# EAGLE board 1 (EAGLE 9.3.2)
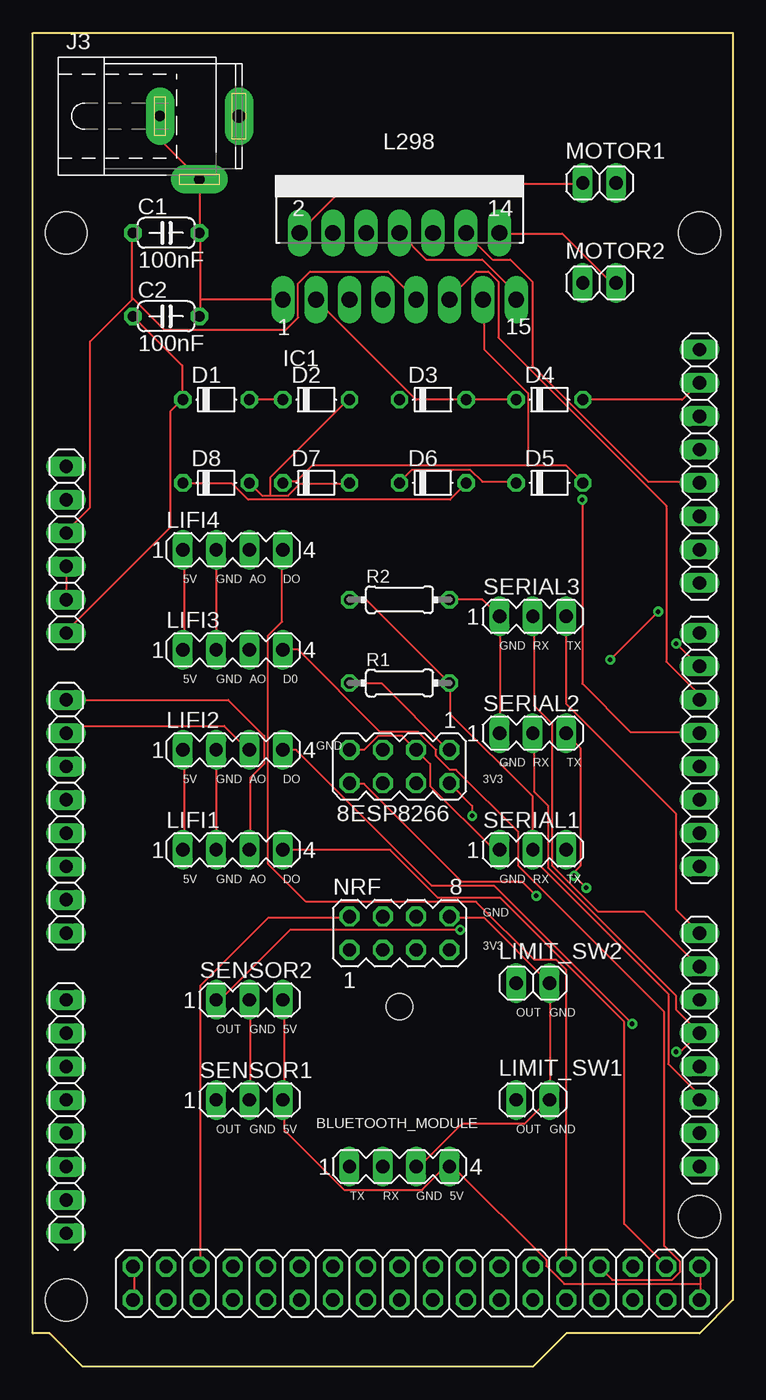
[diagram p0: board, top side]
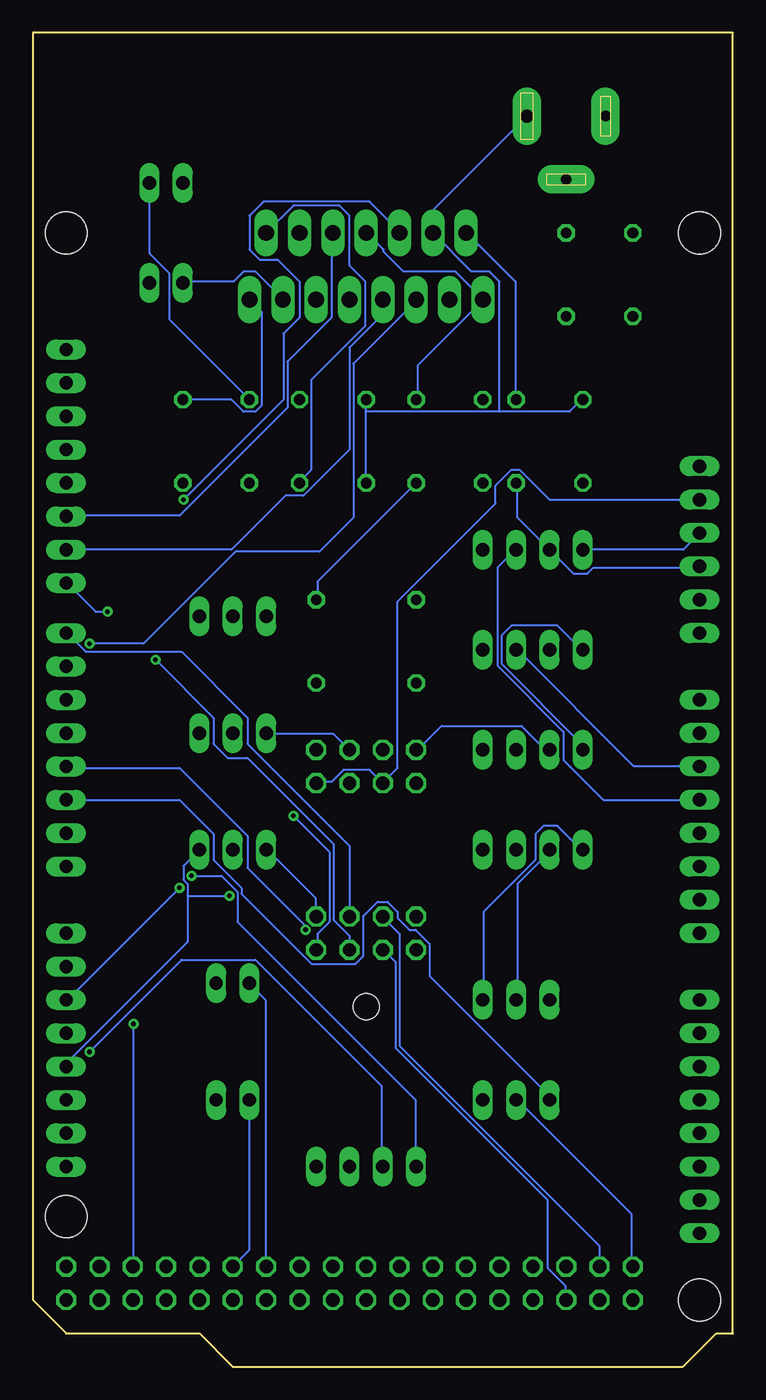
[diagram p1: board, bottom side, seen from below]

Size 53.34 x 101.6 mm. Coordinates in mm from the lower left corner, seen from the top.
Outline: 0,101.6 53.34,101.6 53.34,5.08 50.8,2.54 40.64,2.54 38.1,0 3.81,0 1.27,2.54 0,2.54 0,101.6
Copper layers (1*16): Top 0.035mm / dielectric 1.5mm / Bottom 0.035mm
Design rules "default": minimum track width 6mil, minimum drill 0.35mm, track to track 6mil, track to pad 6mil, pad to pad 6mil, via to via 6mil, smd to smd 6mil, copper to edge 40mil, drill to drill 6mil, minimum pad ring 10mil, minimum via ring 8mil, stop-mask expansion 4mil, vias tented up to drill 0mil, thermal gap 10mil

## Footprints (pad centres in the part's own frame; a part is rotated, then mirrored left to right if it is on the bottom)
MA04-1 = drill 1.016 long: 1 -3.81,0; 2 -1.27,0; 3 1.27,0; 4 3.81,0
C050-024X044 = drill 0.813 octagon: 1 -2.54,0; 2 2.54,0
D-5 = drill 0.813 octagon: A 2.54,0; C -2.54,0
MA04-2 = drill 1.016 octagon: 1 -3.81,-1.27; 2 -3.81,1.27; 3 -1.27,-1.27; 4 -1.27,1.27; 5 1.27,-1.27; 6 1.27,1.27; 7 3.81,-1.27; 8 3.81,1.27
MULTIWATT-15 = drill 1.2 long: 1 -8.89,-7.62; 2 -7.62,-2.54; 3 -6.35,-7.62; 4 -5.08,-2.54; 5 -3.81,-7.62; 6 -2.54,-2.54; 7 -1.27,-7.62; 8 0,-2.54; 9 1.27,-7.62; 10 2.54,-2.54; 11 3.81,-7.62; 12 5.08,-2.54; 13 6.35,-7.62; 14 7.62,-2.54; 15 8.89,-7.62
MEGA_ARDUINO_1 = drill 1.016 long: 1 33.02,2.54; 2 35.56,2.54; 3 38.1,2.54; 4 40.64,2.54; 5 43.18,2.54; 6 45.72,2.54; 7 50.8,2.54; 8 53.34,2.54; 9 55.88,2.54; 10 58.42,2.54; 11 60.96,2.54; 12 63.5,2.54; 13 66.04,2.54; 14 68.58,2.54; 15 73.66,2.54; 16 76.2,2.54; 17 78.74,2.54; 18 81.28,2.54; 19 83.82,2.54; 20 86.36,2.54; 21 88.9,2.54; 22 91.44,2.54; 23 86.36,50.8; 24 83.82,50.8; 25 81.28,50.8; 26 78.74,50.8; 27 76.2,50.8; 28 73.66,50.8; 29 71.12,50.8; 30 68.58,50.8; 31 63.5,50.8; 32 60.96,50.8; 33 58.42,50.8; 34 55.88,50.8; 35 53.34,50.8; 36 50.8,50.8; 37 48.26,50.8; 38 45.72,50.8; 39 41.91,50.8; 40 39.37,50.8; 41 36.83,50.8; 42 34.29,50.8; 43 31.75,50.8; 44 29.21,50.8; 45 26.67,50.8; 46 24.13,50.8 | drill 1.016 octagon: 47 93.98,50.8; 48 96.52,50.8; 49 93.98,48.26; 50 96.52,48.26; 51 93.98,45.72; 52 96.52,45.72; 53 93.98,43.18; 54 96.52,43.18; 55 93.98,40.64; 56 96.52,40.64; 57 93.98,38.1; 58 96.52,38.1; 59 93.98,35.56; 60 96.52,35.56; 61 93.98,33.02; 62 96.52,33.02; 63 93.98,30.48; 64 96.52,30.48; 65 93.98,27.94; 66 96.52,27.94; 67 93.98,25.4; 68 96.52,25.4; 69 93.98,22.86; 70 96.52,22.86; 71 93.98,20.32; 72 96.52,20.32; 73 93.98,17.78; 74 96.52,17.78; 75 93.98,15.24; 76 96.52,15.24; 77 93.98,12.7; 78 96.52,12.7; 79 93.98,10.16; 80 96.52,10.16; 81 93.98,7.62; 82 96.52,7.62 | hole 3.2: 15.24,50.8; 15.24,2.54; 90.17,50.8; 96.52,2.54 | hole 2: 74.168,27.94
SPC4077 = drill 0.8 pad 2.184 long: 1 -3,0; 2 0,-4.8 | drill 1 pad 2.184 long: 3 3,0
1X02 = drill 1.016 long: 1 -1.27,0; 2 1.27,0
0204/7 = drill 0.813 octagon: 1 -3.81,0; 2 3.81,0
MA03-1 = drill 1.016 long: 1 -2.54,0; 2 0,0; 3 2.54,0

## Placement (x,y rotation side)
BLUETOOTH_MODULE  [MA04-1]  27.94,15.24 0 top
C1  100nF  [C050-024X044]  10.16,86.36 0 top
C2  100nF  [C050-024X044]  10.16,80.01 0 top
D1  [D-5]  13.97,73.66 0 top
D2  [D-5]  21.59,73.66 0 top
D3  [D-5]  30.48,73.66 0 top
D4  [D-5]  39.37,73.66 0 top
D5  [D-5]  39.37,67.31 0 top
D6  [D-5]  30.48,67.31 0 top
D7  [D-5]  21.59,67.31 0 top
D8  [D-5]  13.97,67.31 0 top
ESP8266  [MA04-2]  27.94,45.72 180 top
IC1  L298  [MULTIWATT-15]  27.94,88.9 0 top
IC2  [MEGA_ARDUINO_1]  0,101.6 270 top
J3  [SPC4077]  12.7,95.25 0 top
LIFI1  [MA04-1]  15.24,39.37 0 top
LIFI2  [MA04-1]  15.24,46.99 0 top
LIFI3  [MA04-1]  15.24,54.61 0 top
LIFI4  [MA04-1]  15.24,62.23 0 top
LIMIT_SW1  [1X02]  38.1,20.32 0 top
LIMIT_SW2  [1X02]  38.1,29.21 0 top
MOTOR1  [1X02]  43.18,90.17 0 top
MOTOR2  [1X02]  43.18,82.55 0 top
NRF  [MA04-2]  27.94,33.02 0 top
R1  1k  [0204/7]  27.94,52.07 0 top
R2  2k2  [0204/7]  27.94,58.42 0 top
SENSOR1  [MA03-1]  16.51,20.32 0 top
SENSOR2  [MA03-1]  16.51,27.94 0 top
SERIAL1  [MA03-1]  38.1,39.37 0 top
SERIAL2  [MA03-1]  38.1,48.26 0 top
SERIAL3  [MA03-1]  38.1,57.15 0 top

## Library data of the parts
BLUETOOTH_MODULE ESP8266 LIFI1-LIFI4 NRF SENSOR1 SENSOR2 SERIAL1-SERIAL3 = con-lstb; OC_FARNELL: unknown; OC_NEWARK: unknown
C1 C2 = rcl
D1-D8 = diode
IC1 = st-microelectronics; MPN: L298N; OC_FARNELL: 1589425; OC_NEWARK: 32M1527
IC2 = arduino
J3 = con-jack; OC_FARNELL: unknown; OC_NEWARK: unknown
LIMIT_SW1 LIMIT_SW2 MOTOR1 MOTOR2 = pinhead
R1 R2 = rcl; SPICEPREFIX: R

## Nets
2: IC2.33 SENSOR1.1
3: IC2.34 SENSOR2.1
3V3: ESP8266.2 ESP8266.6 IC2.2 NRF.7
4: IC1.6 IC2.35
5: IC1.11 IC2.36
5V: BLUETOOTH_MODULE.4 C1.1 IC1.9 IC2.3 IC2.47 IC2.48 LIFI1.1 LIFI2.1 LIFI3.1 LIFI4.1 SENSOR1.3 SENSOR2.3
6: IC1.5 IC2.37
7: IC2.38 NRF.6
8: IC2.39 NRF.5
9: IC1.7 IC2.40
10: IC1.10 IC2.41
11: IC1.12 IC2.42
22: IC2.49 LIFI1.4
24: IC2.51 LIFI2.4
26: IC2.53 LIFI3.4
28: IC2.55 LIFI4.4
30: IC2.57 LIMIT_SW1.1
32: IC2.59 LIMIT_SW2.1
A0: IC2.7 LIFI1.3
A1: IC2.8 LIFI2.3
A2: IC2.9 LIFI3.3
A3: IC2.10 LIFI4.3
GND: BLUETOOTH_MODULE.3 C1.2 C2.2 D2.A D4.A D7.A D8.A ESP8266.3 ESP8266.7 IC1.1 IC1.8 IC1.15 IC2.4 IC2.5 IC2.45 IC2.81 IC2.82 J3.1 J3.2 LIFI1.2 LIFI2.2 LIFI3.2 LIFI4.2 LIMIT_SW1.2 LIMIT_SW2.2 NRF.8 R2.2 SENSOR1.2 SENSOR2.2 SERIAL1.1 SERIAL2.1 SERIAL3.1
MISO: IC2.77 NRF.2
MOSI: IC2.78 NRF.3
N$1: D1.A D2.C IC1.2 MOTOR1.1
N$2: D3.A D4.C IC1.3 MOTOR1.2
N$3: D6.A D8.C IC1.14 MOTOR2.2
N$4: D5.A D7.C IC1.13 MOTOR2.1
N$5: ESP8266.1 R1.1
N$17: IC2.43
N$18: IC2.44
N$22: NRF.1
N$30: IC2.31
N$31: IC2.32
R1: IC2.25 R1.2 R2.1 SERIAL1.2
R2: BLUETOOTH_MODULE.2 IC2.27 SERIAL2.2
R3: IC2.29 SERIAL3.2
SCK: IC2.79 NRF.4
SS: IC2.80
T1: ESP8266.8 IC2.26 SERIAL1.3
T2: BLUETOOTH_MODULE.1 IC2.28 SERIAL2.3
T3: IC2.30 SERIAL3.3
VIN: C2.1 D1.C D3.C D5.C D6.C IC1.4 IC2.6 J3.3

## Tracks (layer width: path | path; a pad name or v marks a point on that pad's centre or on a via)
2
  Bottom 0.152: SENSOR1.1 13.97,20.62 23.11,29.77 23.11,32.21 24.18,33.27 24.64,33.27 25.55,34.19 25.55,34.65 26.31,35.41 27.08,35.41 28.14,34.34 28.14,31.29 28.75,30.68 32.11,30.68 37.44,36.02 37.44,36.47 39.57,38.61 39.57,40.59 42.16,43.18 IC2.33
3  (via drill 0.35)
  Top 0.152: SENSOR2.1 14.28,27.94 19.61,33.27 v32.56,33.27
  Bottom 0.152: v32.56,33.27 32.56,33.58 36.98,38 36.98,40.44 42.16,45.62 50.7,45.62 IC2.34
3V3  (via drill 0.35)
  Top 0.152: v33.48,41.96 33.48,42.72 ESP8266.2
  Bottom 0.152: v33.48,41.96 30.73,39.22 30.73,33.88 31.65,32.97 31.65,31.75 NRF.7 | IC2.2 13.97,66.04 16.26,68.33 16.87,68.33 18.09,67.11 18.09,65.73 25.55,58.27 25.55,45.62 26.62,44.55 ESP8266.6 27.69,45.47 29.67,45.47 30.58,44.55 31.65,44.55 ESP8266.2
4  (via drill 0.35)
  Top 0.152: v41.86,66.04 41.86,52.02 45.52,48.36 50.7,48.36 IC2.35
  Bottom 0.152: v41.86,66.04 34.24,73.66 34.24,78.69 33.02,79.91 33.02,82.65 34.7,84.33 36.07,84.33 36.83,85.09 36.83,87.68 35.76,88.75 27.69,88.75 25.4,86.46 IC1.6
5
  Top 0.152: IC2.36 50.7,50.8 50.7,51.26 48.26,53.7 48.26,65.58 35.46,78.38 35.46,82.65 34.7,83.41 33.78,83.41 31.65,81.28 IC1.11
5V
  Top 0.152: 50.85,6.3 50.85,7.52 IC2.47 | 50.85,6.3 50.85,5.08 IC2.48 | 19.15,20.32 19.15,27.94 SENSOR2.3 | 19.15,20.32 19.15,18.03 23.72,13.46 29.67,13.46 31.34,15.14 31.65,15.14 BLUETOOTH_MODULE.4 31.8,15.14 32.11,15.14 39.12,8.13 39.12,7.67 40.49,6.3 50.85,6.3 | 19.15,20.32 SENSOR1.3 | LIFI1.1 11.53,39.37 11.53,46.99 LIFI2.1 | LIFI3.1 11.53,54.61 11.53,62.23 LIFI4.1 | 7.57,81.43 7.57,81.28 4.37,78.08 4.37,65.43 2.54,63.6 IC2.3 | 7.57,81.43 7.57,86.31 C1.1 | IC1.9 27.08,83.41 21.13,83.41 20.22,82.5 20.22,79.91 19.3,78.99 10.01,78.99 7.57,81.43
  Bottom 0.152: LIFI2.1 11.53,46.99 11.53,47.45 17.63,53.54 17.63,55.68 16.87,56.44 13.36,56.44 11.53,54.61 LIFI3.1 | LIFI4.1 3.76,62.23 2.54,63.45 IC2.3 | SENSOR2.3 19,27.94 19,34.65 15.04,38.61 15.04,40.59 14.43,41.2 13.36,41.2 11.53,39.37 LIFI1.1
6  (via drill 0.35)
  Top 0.152: v49.02,55.07 50.7,53.39 IC2.37
  Bottom 0.152: v49.02,55.07 44.91,55.07 37.9,62.08 31.5,62.08 28.9,64.67 28.9,76.4 24.03,81.28 IC1.5
7
  Bottom 0.152: NRF.6 29.21,39.68 36.98,47.45 36.98,49.43 42.01,54.46 49.33,54.46 50.7,55.83 IC2.38
8  (via drill 0.35)
  Top 0.152: v47.65,57.51 v43.99,53.85
  Bottom 0.152: NRF.5 29.21,32.82 30.43,34.04 30.43,39.83 36.98,46.38 38.51,46.38 39.57,47.45 39.57,49.43 v43.99,53.85 | v47.65,57.51 48.56,57.51 50.7,59.64 IC2.39
9
  Bottom 0.152: IC2.40 38.2,62.23 34.09,66.34 32.72,66.34 29.21,69.85 29.21,77.62 26.77,80.06 26.77,81.28 IC1.7
10
  Bottom 0.152: IC2.41 50.7,64.82 42.16,64.82 33.93,73.05 33.93,76.56 30.58,79.91 30.58,86.31 IC1.10
11
  Top 0.152: IC2.42 50.7,67.41 46.89,67.41 38.05,76.25 38.05,82.65 36.37,84.33 35,84.33 33.02,86.31 IC1.12
22
  Top 0.152: LIFI1.4 27.23,39.37 30.89,35.71 35.61,35.71 45.06,26.26 45.06,10.87 48.26,7.67 IC2.49
24  (via drill 0.35)
  Top 0.152: LIFI2.4 20.07,46.99 30.43,36.63 35.15,36.63 v45.67,26.11
  Bottom 0.152: v45.67,26.11 45.67,7.67 IC2.51
26
  Top 0.152: LIFI3.4 20.22,54.61 26.47,48.36 29.36,48.36 30.73,46.99 30.73,46.53 31.8,45.47 32.26,45.47 36.98,40.74 36.98,38.15 48.11,27.03 48.11,9.2 49.33,7.98 49.33,7.21 48.72,6.6 44.15,6.6 43.23,7.52 IC2.53
28
  Top 0.152: IC2.55 40.64,30.23 39.88,30.99 38.2,30.99 33.78,35.41 20.83,35.41 17.93,38.3 17.93,55.68 19,56.74 19,62.23 LIFI4.4
30
  Bottom 0.152: LIMIT_SW1.1 36.83,8.89 IC2.57
32
  Bottom 0.152: IC2.59 35.61,7.67 35.61,27.94 36.83,29.16 LIMIT_SW2.1
A0
  Top 0.152: IC2.7 14.88,50.8 17.63,48.06 17.63,45.92 16.56,44.86 16.56,39.37 LIFI1.3
A1
  Top 0.152: LIFI2.3 16.41,46.99 14.58,48.82 3,48.82 2.54,48.36 IC2.8
A2
  Bottom 0.152: IC2.9 2.54,45.77 7.57,45.77 16.41,54.61 LIFI3.3
A3
  Bottom 0.152: IC2.10 9.86,43.18 12.9,46.23 12.9,48.36 17.93,53.39 17.93,60.86 16.56,62.23 LIFI4.3
GND
  Top 0.152: BLUETOOTH_MODULE.3 29.21,15.29 29.52,15.29 32.72,18.49 37.44,18.49 39.27,20.32 LIMIT_SW1.2 39.42,20.32 39.42,29.16 LIMIT_SW2.2 34.39,34.19 31.8,34.19 NRF.8 | IC2.82 7.72,5.08 7.72,7.52 IC2.81 | SENSOR1.2 16.56,20.32 16.56,27.94 SENSOR2.2 | LIFI2.2 LIFI1.2 | R2.2 34.24,58.42 35.46,57.2 SERIAL3.1 35.61,57.05 35.61,48.36 SERIAL2.1 | ESP8266.7 25.25,46.99 26.31,48.06 28.14,48.06 ESP8266.3 30.28,45.92 30.28,44.25 35.15,39.37 SERIAL1.1 | IC2.4 IC2.5 | 18.09,66.34 17.47,66.34 D8.A | 18.09,66.34 19.46,66.34 20.37,67.26 24.03,67.26 D7.A | LIFI4.2 LIFI3.2 | 12.75,81.28 12.75,86.31 C1.2 12.75,86.46 12.75,90.42 J3.2 12.6,90.58 9.7,93.47 9.7,95.15 J3.1 | 12.75,81.28 12.75,80.06 C2.2 | D4.A 49.48,73.66 50.7,74.88 IC2.45 | IC1.15 36.83,81.74 34.24,84.33 29.97,84.33 IC1.8 | IC1.1 12.75,81.28 | 18.09,66.34 18.09,67.72 24.03,73.66 D2.A
  Bottom 0.152: NRF.8 31.8,34.34 31.8,35.71 35.46,39.37 SERIAL1.1 | IC2.81 7.72,7.67 7.72,11.63 16.41,20.32 SENSOR1.2 | ESP8266.3 30.43,48.21 35.46,48.21 SERIAL2.1 | LIFI2.2 14.28,46.99 16.1,48.82 22.2,48.82 24.03,46.99 ESP8266.7 | LIFI1.2 13.97,39.22 16.41,36.78 16.41,27.94 SENSOR2.2 | D8.A 16.41,67.26 16.41,64.67 LIFI4.2 12.14,60.4 11.07,60.4 10.62,60.86 2.54,60.86 IC2.4 | 19,81.28 24.03,76.25 24.03,73.66 D2.A | 19,81.28 21.13,83.41 25.1,83.41 26.62,84.94 26.62,85.09 27.84,86.31 IC1.8 | 19,81.28 IC1.1 | D4.A 38.2,73.66 37.29,72.75 36.37,72.75 35.92,73.2 35.92,80.37 IC1.15 | D7.A 31.65,59.79 31.65,58.42 R2.2
MISO
  Top 0.152: IC2.77 12.75,7.67 12.75,29.01 17.93,34.19 24.03,34.19 NRF.2
MOSI
  Bottom 0.152: IC2.78 12.75,5.08 12.75,6.15 14.12,7.52 14.12,12.7 25.71,24.28 25.71,30.84 26.62,31.75 NRF.3
N$1
  Top 0.152: D2.C D1.A | MOTOR1.1 41.86,90.12 24.03,90.12 20.37,86.46 IC1.2
  Bottom 0.152: D1.A 16.56,73.66 16.56,82.65 20.22,86.31 IC1.2
N$2
  Top 0.152: D4.C D3.A 29.21,73.66 IC1.3
  Bottom 0.152: MOTOR1.2 44.45,84.78 42.93,83.26 42.93,79.76 D4.C
N$3
  Top 0.152: MOTOR2.2 44.45,82.65 43.99,82.65 40.34,86.31 35.61,86.31 IC1.14 | D8.C 11.53,67.26 15.19,67.26 16.41,66.04 31.8,66.04 33.02,67.26 D6.A
  Bottom 0.152: IC1.14 33.48,88.44 29.97,88.44 29.21,87.68 29.21,83.87 27.99,82.65 27.99,79.3 32.11,75.18 32.11,68.33 33.02,67.41 D6.A
N$4
  Top 0.152: 37.74,68.63 40.64,68.63 41.86,67.41 D5.A | 37.74,68.63 21.29,68.63 20.07,67.41 19.15,67.41 D7.C | 37.74,68.63 37.74,74.12 34.39,77.47 34.39,81.28 IC1.13
  Bottom 0.152: MOTOR2.1 41.86,82.65 38.05,82.65 37.29,83.41 36.37,83.41 34.24,81.28 IC1.13
N$5
  Top 0.152: R1.1 24.18,52.02 26.62,52.02 31.65,46.99 ESP8266.1
R1
  Top 0.152: R2.1 25.4,58.42 R1.2 31.8,52.02 31.8,49.73 38.05,43.49 38.05,39.37 SERIAL1.2 38.2,39.37 38.2,38.61 48.41,28.4 48.41,23.06 50.7,20.78 50.7,20.32 IC2.25
R2  (via drill 0.35)
  Top 0.152: v49.02,23.98 49.33,23.98 50.7,25.35 IC2.27 49.02,27.18 49.02,28.25 39.27,38 39.27,42.72 38.2,43.79 38.2,48.21 SERIAL2.2
  Bottom 0.152: v49.02,23.98 42.01,30.99 36.37,30.99 26.77,21.39 26.77,15.29 BLUETOOTH_MODULE.2
R3
  Top 0.152: SERIAL3.2 38.2,57.05 38.2,50.34 39.57,48.97 39.57,38.15 43.08,34.65 46.58,34.65 50.7,30.53 IC2.29
SCK
  Bottom 0.152: IC2.79 10.16,9.2 25.4,24.43 25.4,32.97 26.62,34.19 NRF.4
T1  (via drill 0.35)
  Top 0.152: v38.35,35.87 37.29,36.93 32.72,36.93 25.25,44.4 24.18,44.4 ESP8266.8
  Bottom 0.152: 41.55,35.87 41.55,36.78 41.86,37.08 41.86,38.15 SERIAL1.3 | 41.55,35.87 41.55,32.36 50.7,23.22 50.7,22.91 IC2.26 | 41.55,35.87 v38.35,35.87
T2  (via drill 0.35)
  Top 0.152: SERIAL2.3 40.64,48.21 41.71,47.14 41.71,38.15 41.25,37.69 v41.25,37.39 v42.16,36.47
  Bottom 0.152: v41.25,37.39 38.96,37.39 37.74,36.17 37.74,33.88 24.18,20.32 24.18,15.29 BLUETOOTH_MODULE.1 | v42.16,36.47 50.7,27.94 IC2.28
T3
  Top 0.152: SERIAL3.3 40.64,50.5 49.02,42.11 49.02,34.8 IC2.30
VIN
  Top 0.152: D5.C 36.83,67.41 34.24,67.41 33.33,68.33 28.9,68.33 27.99,67.41 D6.C | 11.38,73.66 11.38,76.25 C2.1 | 11.38,73.66 10.46,72.75 10.46,63.91 2.54,55.98 IC2.6 | 11.38,73.66 D1.C
  Bottom 0.152: J3.3 15.8,95.15 22.81,88.14 22.81,86.46 IC1.4 19.91,83.41 18.54,83.41 17.78,82.65 17.78,72.75 | 27.99,72.75 27.99,73.66 D3.C | 27.99,72.75 27.99,67.41 D6.C | 17.78,72.75 12.45,72.75 11.53,73.66 D1.C | 17.78,72.75 27.99,72.75

## Text on the board
tPlace: 5V | GND | AO | DO | GND | RX | TX | 5V | GND | AO | D0 | GND | GND | GND | RX | TX | 5V | GND | AO | DO | 3V3 | 5V | GND | AO | DO | GND | RX | TX | GND | 3V3 | OUT | GND | OUT | GND | 5V | OUT | GND | 5V | OUT | GND | TX | RX | GND | 5V